# EAGLE board board (EAGLE 7.5.0)
CIRCULAR-LAYOUT-SETTINGS: 1.970000 1.970000 1.620000 0.000000 0 0
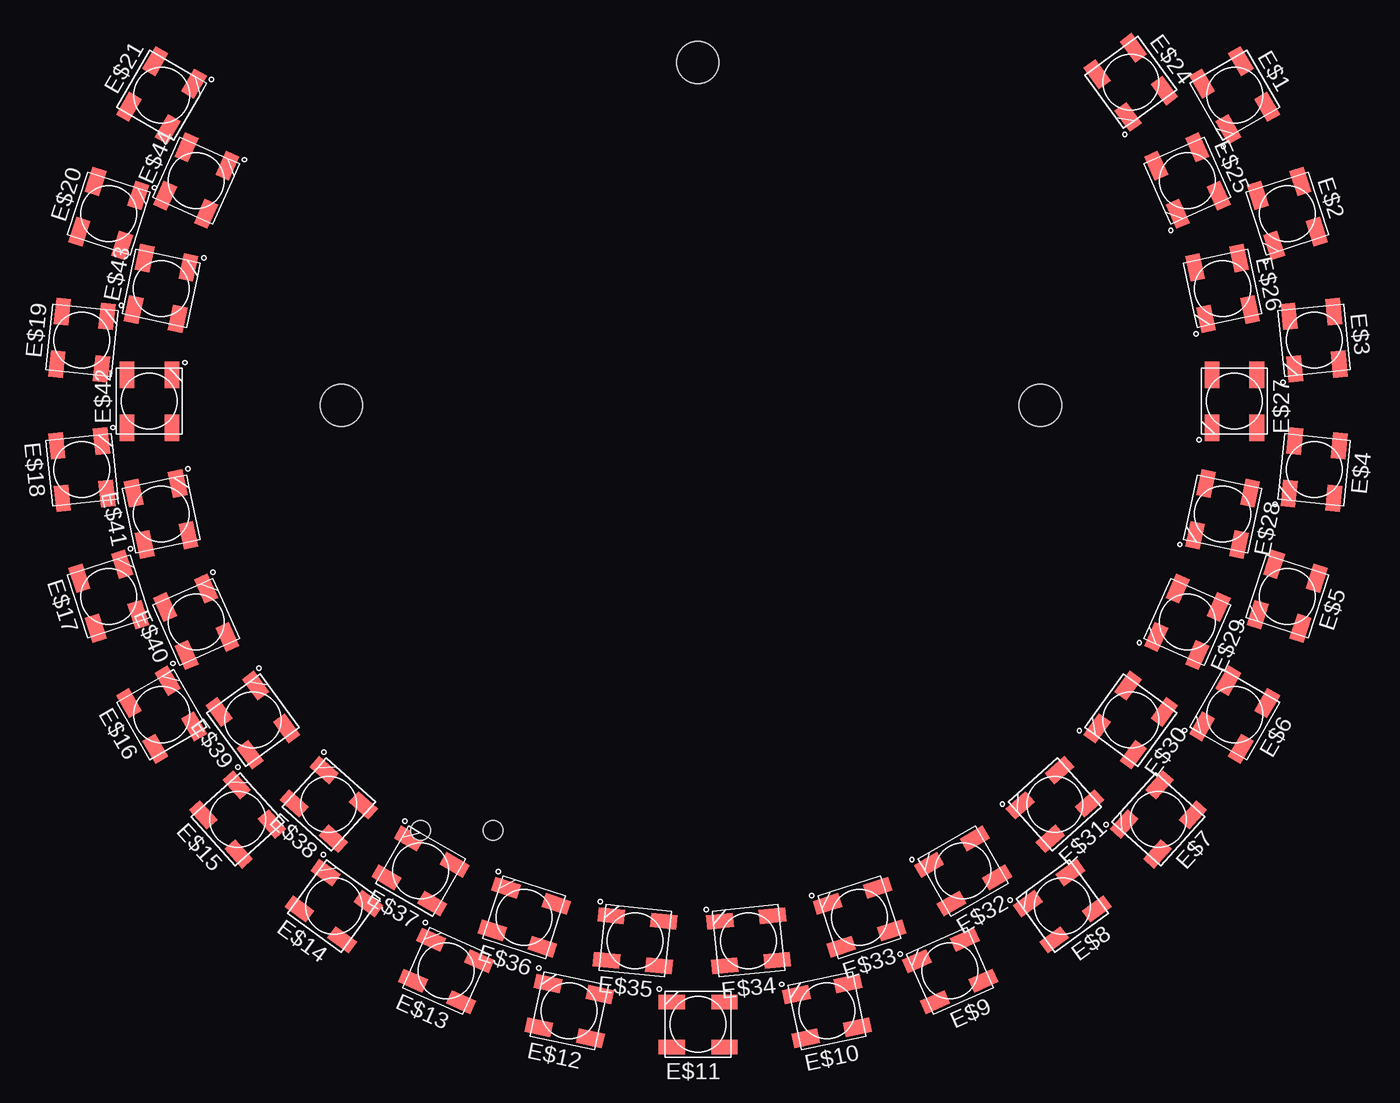
[diagram p0: board, top side]
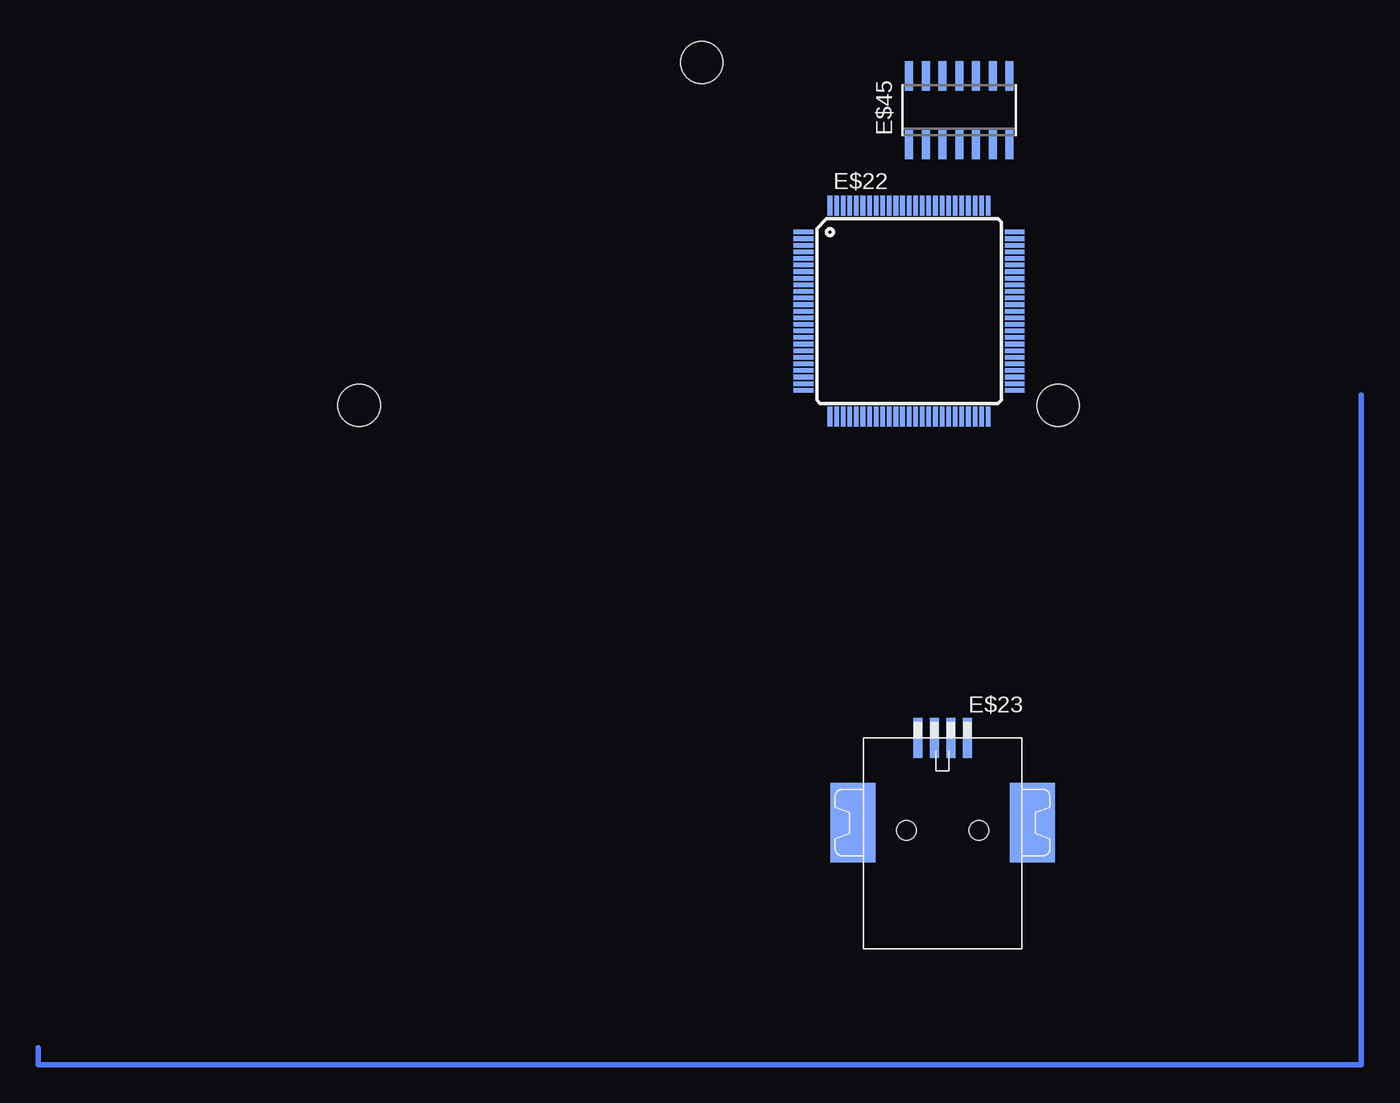
[diagram p1: board, bottom side, seen from below]

No outline drawn. Coordinates in mm, seen from the top.
Copper layers (1*16): Top 0.035mm / dielectric 1.5mm / Bottom 0.035mm
Design rules "default": minimum track width 10mil, minimum drill 24mil, track to track 8mil, track to pad 8mil, pad to pad 8mil, via to via 8mil, smd to smd 8mil, copper to edge 40mil, drill to drill 8mil, minimum pad ring 10mil, minimum via ring 8mil, stop-mask expansion 4mil, vias tented up to drill 0mil, thermal gap 10mil
Holes 3.2 mm at 23,50 76,50 50,76
tRestrict: area 1.5,1.5 to 98.5,98.5; area 4.5,4.5 to 95.5,95.5; area 10.5,10.5 to 89.5,89.5; area 7,7 to 93,93

## Footprints (pad centres in the part's own frame; a part is rotated, then mirrored left to right if it is on the bottom)
WS2812B = smd 2 x 1.1: DIN 2,1.7; DOUT -2,-1.7; VDD -2,1.7; VSS 2,-1.7
LQFP100 = smd 1.5 x 0.35: 1 -8,6; 2 -8,5.5; 3 -8,5; 4 -8,4.5; 5 -8,4; 6 -8,3.5; 7 -8,3; 8 -8,2.5; 9 -8,2; 10 -8,1.5; 11 -8,1; 12 -8,0.5; 13 -8,0; 14 -8,-0.5; 15 -8,-1; 16 -8,-1.5; 17 -8,-2; 18 -8,-2.5; 19 -8,-3; 20 -8,-3.5; 21 -8,-4; 22 -8,-4.5; 23 -8,-5; 24 -8,-5.5; 25 -8,-6; 51 8,-6; 52 8,-5.5; 53 8,-5; 54 8,-4.5; 55 8,-4; 56 8,-3.5; 57 8,-3; 58 8,-2.5; 59 8,-2; 60 8,-1.5; 61 8,-1; 62 8,-0.5; 63 8,0; 64 8,0.5; 65 8,1; 66 8,1.5; 67 8,2; 68 8,2.5; 69 8,3; 70 8,3.5; 71 8,4; 72 8,4.5; 73 8,5; 74 8,5.5; 75 8,6 | smd 0.35 x 1.5: 26 -6,-8; 27 -5.5,-8; 28 -5,-8; 29 -4.5,-8; 30 -4,-8; 31 -3.5,-8; 32 -3,-8; 33 -2.5,-8; 34 -2,-8; 35 -1.5,-8; 36 -1,-8; 37 -0.5,-8; 38 0,-8; 39 0.5,-8; 40 1,-8; 41 1.5,-8; 42 2,-8; 43 2.5,-8; 44 3,-8; 45 3.5,-8; 46 4,-8; 47 4.5,-8; 48 5,-8; 49 5.5,-8; 50 6,-8; 76 6,8; 77 5.5,8; 78 5,8; 79 4.5,8; 80 4,8; 81 3.5,8; 82 3,8; 83 2.5,8; 84 2,8; 85 1.5,8; 86 1,8; 87 0.5,8; 88 0,8; 89 -0.5,8; 90 -1,8; 91 -1.5,8; 92 -2,8; 93 -2.5,8; 94 -3,8; 95 -3.5,8; 96 -4,8; 97 -4.5,8; 98 -5,8; 99 -5.5,8; 100 -6,8
USB-B-SMD = smd 3 x 0.7: 1 7,1.875; 2 7,0.625; 3 7,-0.625; 4 7,-1.875 | smd 6.04 x 3.4: M1 0.58,-6.8; M2 0.58,6.8 | hole 1.5: 0,-2.75; 0,2.75
SO14 = smd 0.6 x 2.2: 1 -3.81,-2.6; 2 -2.54,-2.6; 3 -1.27,-2.6; 4 0,-2.6; 5 1.27,-2.6; 6 2.54,-2.6; 7 3.81,-2.6; 8 3.81,2.6; 9 2.54,2.6; 10 1.27,2.6; 11 0,2.6; 12 -1.27,2.6; 13 -2.54,2.6; 14 -3.81,2.6

## Placement (x,y rotation side)
E$1  [WS2812B]  90.73,73.53 300 top
E$2  [WS2812B]  94.73,64.56 288 top
E$3  [WS2812B]  96.77,54.95 276 top
E$4  [WS2812B]  96.77,45.13 264 top
E$5  [WS2812B]  94.73,35.52 252 top
E$6  [WS2812B]  90.73,26.54 240 top
E$7  [WS2812B]  84.96,18.6 228 top
E$8  [WS2812B]  77.66,12.02 216 top
E$9  [WS2812B]  69.15,7.11 204 top
E$10  [WS2812B]  59.81,4.07 192 top
E$11  [WS2812B]  50.04,3.05 180 top
E$12  [WS2812B]  40.27,4.07 168 top
E$13  [WS2812B]  30.93,7.11 156 top
E$14  [WS2812B]  22.42,12.02 144 top
E$15  [WS2812B]  15.12,18.6 132 top
E$16  [WS2812B]  9.34,26.54 120 top
E$17  [WS2812B]  5.35,35.52 108 top
E$18  [WS2812B]  3.31,45.13 96 top
E$19  [WS2812B]  3.31,54.95 84 top
E$20  [WS2812B]  5.35,64.56 72 top
E$21  [WS2812B]  9.34,73.53 60 top
E$22  [LQFP100]  34.29,57.15 0 bottom
E$23  [USB-B-SMD]  31.75,17.78 90 bottom
E$24  [WS2812B]  82.85,74.5 306 top
E$25  [WS2812B]  87.16,67.05 294 top
E$26  [WS2812B]  89.81,58.87 282 top
E$27  [WS2812B]  90.71,50.32 270 top
E$28  [WS2812B]  89.81,41.76 258 top
E$29  [WS2812B]  87.16,33.58 246 top
E$30  [WS2812B]  82.85,26.13 234 top
E$31  [WS2812B]  77.1,19.74 222 top
E$32  [WS2812B]  70.14,14.68 210 top
E$33  [WS2812B]  62.28,11.18 198 top
E$34  [WS2812B]  53.87,9.39 186 top
E$35  [WS2812B]  45.26,9.39 174 top
E$36  [WS2812B]  36.85,11.18 162 top
E$37  [WS2812B]  28.99,14.68 150 top
E$38  [WS2812B]  22.03,19.74 138 top
E$39  [WS2812B]  16.28,26.13 126 top
E$40  [WS2812B]  11.97,33.58 114 top
E$41  [WS2812B]  9.32,41.76 102 top
E$42  [WS2812B]  8.42,50.32 90 top
E$43  [WS2812B]  9.32,58.87 78 top
E$44  [WS2812B]  11.97,67.05 66 top
E$45  [SO14]  30.48,72.39 0 bottom

## Library data of the parts
E$1-E$21 E$24-E$44 = WS2812B
E$22 = STM32F407Vx_LQFP100
E$23 = div
E$45 = analog-devices

## Tracks (layer width: path | path; a pad name or v marks a point on that pad's centre or on a via)
S$1
  Bottom 0.406: 0,50.8 0,0 100.33,0 100.33,1.27